# Altium PCB IMU_Board.PcbDoc
Units mil, origin at the board's own origin, x right, y up, seen from the top; angles counter-clockwise.
Board outline 615 x 615 mil, 2 copper layers (Top Layer, Bottom Layer); 11 components, 8 nets, 45 pads, 3 vias.
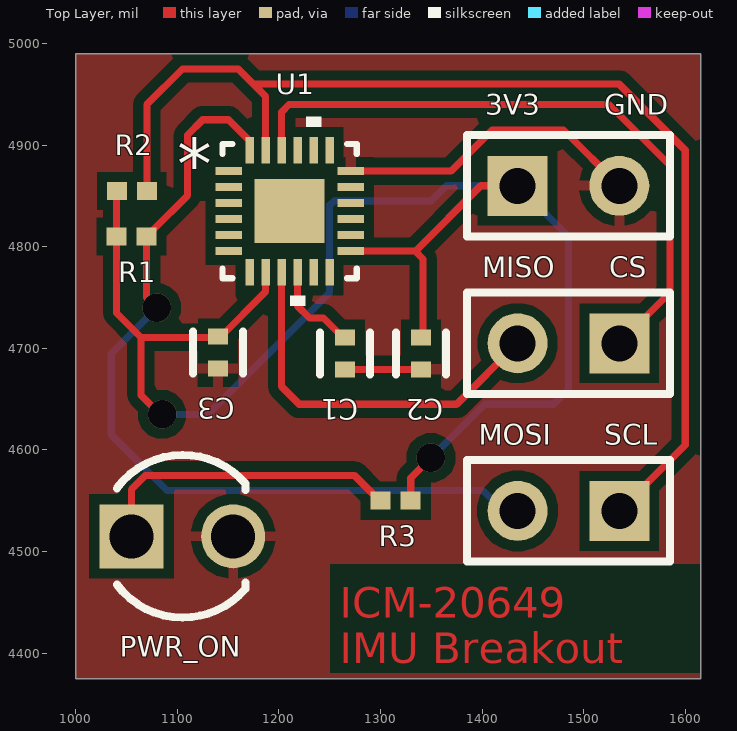
[diagram p0: Top Layer view]
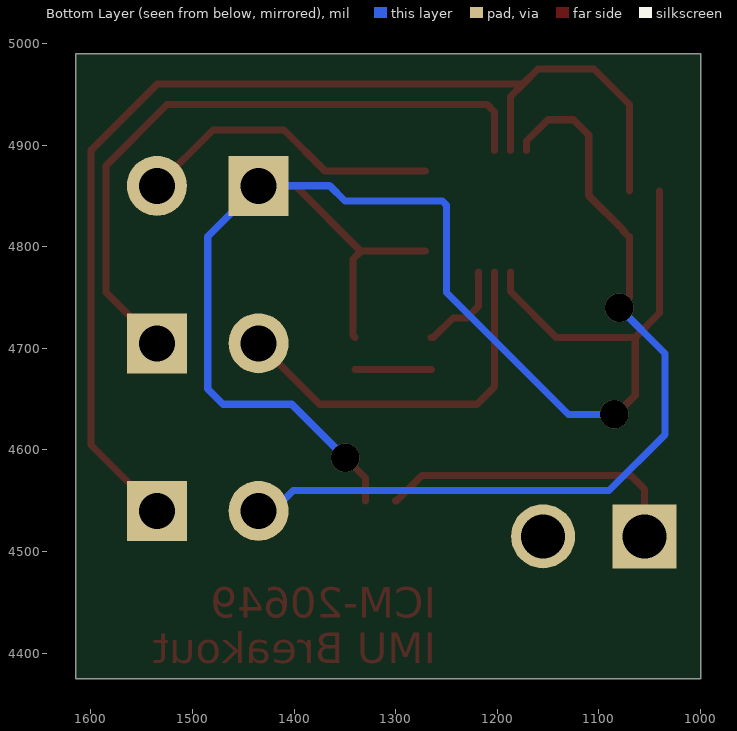
[diagram p1: Bottom Layer view, seen from below]

## Layer stack, top to bottom
Top Solder: solder mask 0.4, Solder Resist, Dk 3.5
Top Layer: signal copper 1.4
Dielectric 1: dielectric 12.6, FR-4, Dk 4.8
Bottom Layer: signal copper 1.4
Bottom Solder: solder mask 0.4, Solder Resist, Dk 3.5

## Board outline
1000,4375 1615,4375 1615,4990 1000,4990

## Design rules (kind name [scope] priority, off if disabled: settings)
Clearance [All] p1: gap=10 ignorepadtopadclearanceinfootprint=FALSE except(0: Arc-Hole Track-Hole SMDPad-Hole THPad-Hole Via-Hole Fill-Hole Poly-Hole Region-Hole Text-Hole; 5: Arc-Arc Arc-Track Arc-SMDPad Arc-Via Track-Track Track-SMDPad Track-Via SMDPad-SMDPad SMDPad-Via THPad-Via)
PolygonConnect [All] p1: connectstyle=Relief reliefconductorwidth=10 reliefentries=4 polygonreliefangle="90 Angle" airgapwidth=10
RoutingVias [All] p1: holewidth=28 width=25 viastyle="Through Hole" minholewidth=28 minwidth=15 maxholewidth=28 maxwidth=130
SolderMaskExpansion [All] p1: expansion=4 istentingtop=FALSE
Width [All] p1: maxlimit=7 minlimit=5 preferedwidth=7 minimp=50.000000 maximp=50.000000 favimp=50.000000
30 further rules are at their usual default settings.

## Classes and differential pairs
component class Custom_IMU_testing: 3V3 C1 C2 C3 MISO MOSI PWR_ON R1 R2 R3

## Components (designator, comment, footprint, x,y, rotation, side; value= is the part's Value field where it differs from the comment)
3V3 "Header 2" HDR1X2 1435,4860 r0 top (schematic designator P1)
C1 "0.1uF" FP-GRM15-MFG 1265,4695 r270 top value=0.10μF
C2 "0.1uF" FP-GRM15-MFG 1340,4695 r90 top value=0.10μF
C3 "0.1uF" FP-GRM15-MFG 1140,4695.75 r90 top value=0.10μF
MISO "Header 2" HDR1X2 1535,4705 r180 top (schematic designator P3)
MOSI "Header 2" HDR1X2 1535,4540 r180 top (schematic designator P2)
PWR_ON "LED" LED-2P-2.54-3MM_V 1105,4515 r0 top (schematic designator D1)
R1 "10k" RESC1005X40X25LL05T10 1055,4810 r180 top
R2 "10k" RESC1005X40X25LL05T10 1055.24,4855 r0 top
R3 "10k" RESC1005X40X25LL05T10 1315,4550 r0 top
U1 "ICM-20649" QFN24_3X3X0P9_IVS 1210.63,4835 r0 top

## Footprints (in the part's own frame and the unit in brackets; to place one, negate y for a bottom-side part, rotate by r counter-clockwise, add the part's x,y. Pads: shape width x height; smd on the part's side, far side on the other; paste and mask are expansions set on the pad)
FP-GRM15-MFG [mm]
  rect 0.4x0.5 smd paste+0 mask+0: 1(-0.4,0) 2(0.4,0)
  silkscreen extent -0.53,-0.63 0.53,0.63, body extent -0.7,-0.38 0.7,0.38, height 0.25
HDR1X2 [mm] "Connector; Header; 2 Position"
  rect 1.5x1.5 hole 0.9: 1(0,0)
  round 1.5 hole 0.9: 2(2.54,0)
  silkscreen extent -1.27,-1.27 3.81,1.27
LED-2P-2.54-3MM_V [mm] "LED, 2-Leads, Dia 3mm, Pitch 2.54mm"
  rect 1.6x1.6 hole 1.1: 1(-1.27,0)
  round 1.6 hole 1.1: 2(1.27,0)
  silkscreen extent -1.64,-2.03 1.57,2.03, body extent -2.06,-2.07 1.6,2.07, height 6.35
QFN24_3X3X0P9_IVS [mil]
  rect 26x8 smd paste+0 mask+0: 1(-60,39.37) 2(-60,23.62) 3(-60,7.87) 4(-60,-7.87) 5(-60,-23.62) 6(-60,-39.37) 13(60,-39.37) 14(60,-23.62) 15(60,-7.87) 16(60,7.87) 17(60,23.62) 18(60,39.37)
  rect 8x26 smd paste+0 mask+0: 7(-39.37,-60) 8(-23.62,-60) 9(-7.87,-60) 10(7.87,-60) 11(23.62,-60) 12(39.37,-60) 19(39.37,60) 20(23.62,60) 21(7.87,60) 22(-7.87,60) 23(-23.62,60) 24(-39.37,60)
  rect 69x63 smd paste+0 mask+0: 25(0,0)
  silkscreen extent -66,-93 66,93, body extent -61,-61 61,61, height 37
RESC1005X40X25LL05T10 [mm] "Chip Resistor, 2-Leads, Body 1.00x0.50mm, IPC High Density"
  rect 0.5x0.45 smd: 1(-0.375,0) 2(0.375,0)
  body extent -0.53,-0.27 0.53,0.28, height 0.4

## Part data
3V3 MISO MOSI: "Header, 2-Pin", LatestRevisionDate=17-Jul-2002, LatestRevisionNote="Re-released for DXP Platform.", Publisher="Altium Limited"
C1 C2 C3: library part CMP-2100-03641-2, "CAP CER 0.1UF 16V X7R 0402", Capacitance=0.10μF, Manufacturer=Murata, Manufacturer Part Number=GRM155R71C104KA88D, Package=GRM15, Temperature="-55°C to +125°C", Temperature Characteristic=X7R, Temperature Range High=+125°C, Temperature Range Low=-55°C, Tolerance=10%, Voltage Rating=16Vdc, Category=Cap, ComponentLink2Description=Datasheet, ComponentLink2URL=https://search.murata.co.jp/Ceramy/image/img/A01X/G101/ENG/GRM155R71H471KA01-01A.pdf, Device Class L1="Passive Components", Device Class L2=Capacitors, Device Class L3="Ceramic Capacitors", Digikey Description="CAP CER 0.1UF 16V X7R 0402", Height=0.55mm, Ipc Land Pattern Name=CAPC10050X219, Lead Free=yes, Material=Ceramic, Mouser Description="0402 0.1 uF 16V ±10 % Tolerance X7R SMT Multilayer Ceramic Capacitor", Octopart=https://octopart.com/grm155r71c104ka88d-murata-196880, RoHS=TRUE, Standoff Height=0mm
PWR_ON: library part CMP-2000-05186-1, "LED, Green, 2 mA, 1.9 V, -20 to 100 degC, 2-Pin THD, RoHS, Bulk", Color=Green, Dominant Wavelength/Color Temperature=569nm, Manufacturer=Avago, Package=2T-1, Category=LEDs, Datasheet URL=https://datasheet.ciiva.com/11773/0900766b800204ad-11773539.pdf, Datasheet Version=Jul-14, Intensity=2.3mcd, Lens Appearance=ColoredDiffused, Lens Shape Type=Circular, Manufacturer URL=http://www.avagotech.com/, Mounting=ThroughHole, Mounting Orientation=TopMount, Number of LEDs=1, Packaging=Bulk, Peak Wavelength=565nm, Pin Count=2, Rad Hard=No, Type=Uni-Color, Viewing Angle=50deg
R1 R2 R3: library part CMP-2002-07353-1, Manufacturer="Yageo / Phycomp", Part Number=RC0402FR-0710KL
U1: "No Description Available", Mfr_Name=InvenSense, Copyright="Copyright (C) 2023 Ultra Librarian. All rights reserved.", Manufacturer_Part_Number=ICM-20649, RefDes=RefDes, Type=DEV

## Via types
v1: diameter 28, hole 28, Top Layer to Bottom Layer, 3 vias

## Nets (pads, with @x,y where several pads share a name; then routed paths per layer and width w, separated by ;. In a path a pad name is that pad's centre, name@x,y a point inside that pad or via, vN(x,y) a via of type N, cw(c..) or ccw(c..) an arc to the next point about the centre after c; other vN are vias at no path point)
3V3: 3V3.1 C2.2 C3.2 R1.2 R2.1 R3.2 U1.8 U1.13 | length 1608.4
  Top Layer w7: R2.1 1040.35,4854.88 1040.35,4810.12 R1.2 1040.24,4734.76 1064.25,4710.75 ; v1(1085,4635) 1083.1,4635 1064.25,4653.85 1064.25,4710.75 ; U1.8 1187.01,4755.79 1141.97,4710.75 1064.25,4710.75 ; U1.13 1334.37,4795.63 ; R3.2 1329.76,4572.43 v1(1349.64,4592.3) ; C2.2 1341.97,4712.72 1341.97,4788.03 1334.37,4795.63 ; 3V3.1 1398.74,4860 1334.37,4795.63
  Bottom Layer w7: v1(1085,4635) 1130,4635 1250,4755 1250,4840.9 1254.1,4845 1350,4845 1365,4860 3V3.1 1485,4810 1485,4660 1470,4645 1402.34,4645 v1(1349.64,4592.3)
GND: 3V3.2 C1.2 C2.1 C3.1 PWR_ON.2 U1.18 | length 379
  Top Layer w7: C1.2 C2.1 ; U1.18 1369.37,4874.37 1410,4915 1480,4915 3V3.2
MISO: MISO.2 U1.9 | length 377
  Top Layer w7: U1.9 1202.76,4662.24 1220,4645 1375,4645 MISO.2
nCS: MISO.1 U1.22 | length 643.6
  Top Layer w7: U1.22 1202.76,4932.76 1210,4940 1525,4940 1585,4880 1585,4755 MISO.1
NetC1_1: C1.1 U1.10 | length 93.4
  Top Layer w7: U1.10@1219,4774.5 U1.10 1218.5,4741.5 1230,4730 1243.78,4730 1263.03,4710.75 C1.1
NetD1_1: PWR_ON.1 R3.1 | length 342.9
  Top Layer w7: PWR_ON.1@1080,4490 PWR_ON.1 1055,4561.22 1068.78,4575 1274.25,4575 1299.25,4550 R3.1
SCL: MOSI.1 R2.2 U1.23 | length 1114.5
  Top Layer w7: R2.2 1070,4940 1105,4975 1160,4975 1175,4960 ; U1.23 1187.01,4947.99 1175,4960 ; MOSI.1 1600,4605 1600,4895 1535,4960 1175,4960
SDA_MOSI: MOSI.2 R1.1 U1.24 | length 851.4
  Top Layer w7: v1(1080,4740) 1069.76,4750.24 R1.1 1070.75,4810 1076.11,4815.36 1076.11,4816.34 1110,4850.24 1110,4910 1125,4925 1150.26,4925 1171.26,4904 U1.24
  Bottom Layer w7: v1(1080,4740) 1035,4695 1035,4615 1090,4560 1400.91,4560 1420.91,4540 MOSI.2
pads on no net: U1.1 U1.2 U1.3 U1.4 U1.5 U1.6 U1.7 U1.11 U1.12 U1.14 U1.15 U1.16 U1.17 U1.19 U1.20 U1.21 U1.25

## Polygon pours and split planes (outlines as drawn)
GND on Top Layer "GND_L01" (solid, pour order 0): 1000,4990 1615,4990 1615,4375 1000,4375

## Other copper
Top Layer:
  text "ICM-20649  / IMU Breakout" at 1260,4390 h30

## Silkscreen, mask and mechanical layers (free items; w line width, h text height)
Top Overlay:
  text "GND" at 1520,4930 h20
  text "CS" at 1525,4770 h20
  text "SCL" at 1520,4605 h20

## Text inside footprints (layer, text, board x,y; h text height)
U1: Top Overlay "*" at 1100.13,4857.24 h50; Mechanical 13 "*" at 1151.13,4857.24 h50